# Altium PCB teste2pcb.PcbDoc
Units mm, origin at the board's own origin, x right, y up, seen from the top; angles counter-clockwise.
Board outline 78.1 x 56.64 mm, 2 copper layers (Top Layer, Bottom Layer); 30 components, 19 nets, 104 pads, 0 vias.
Unrouted connection lines stored in the file: 4.
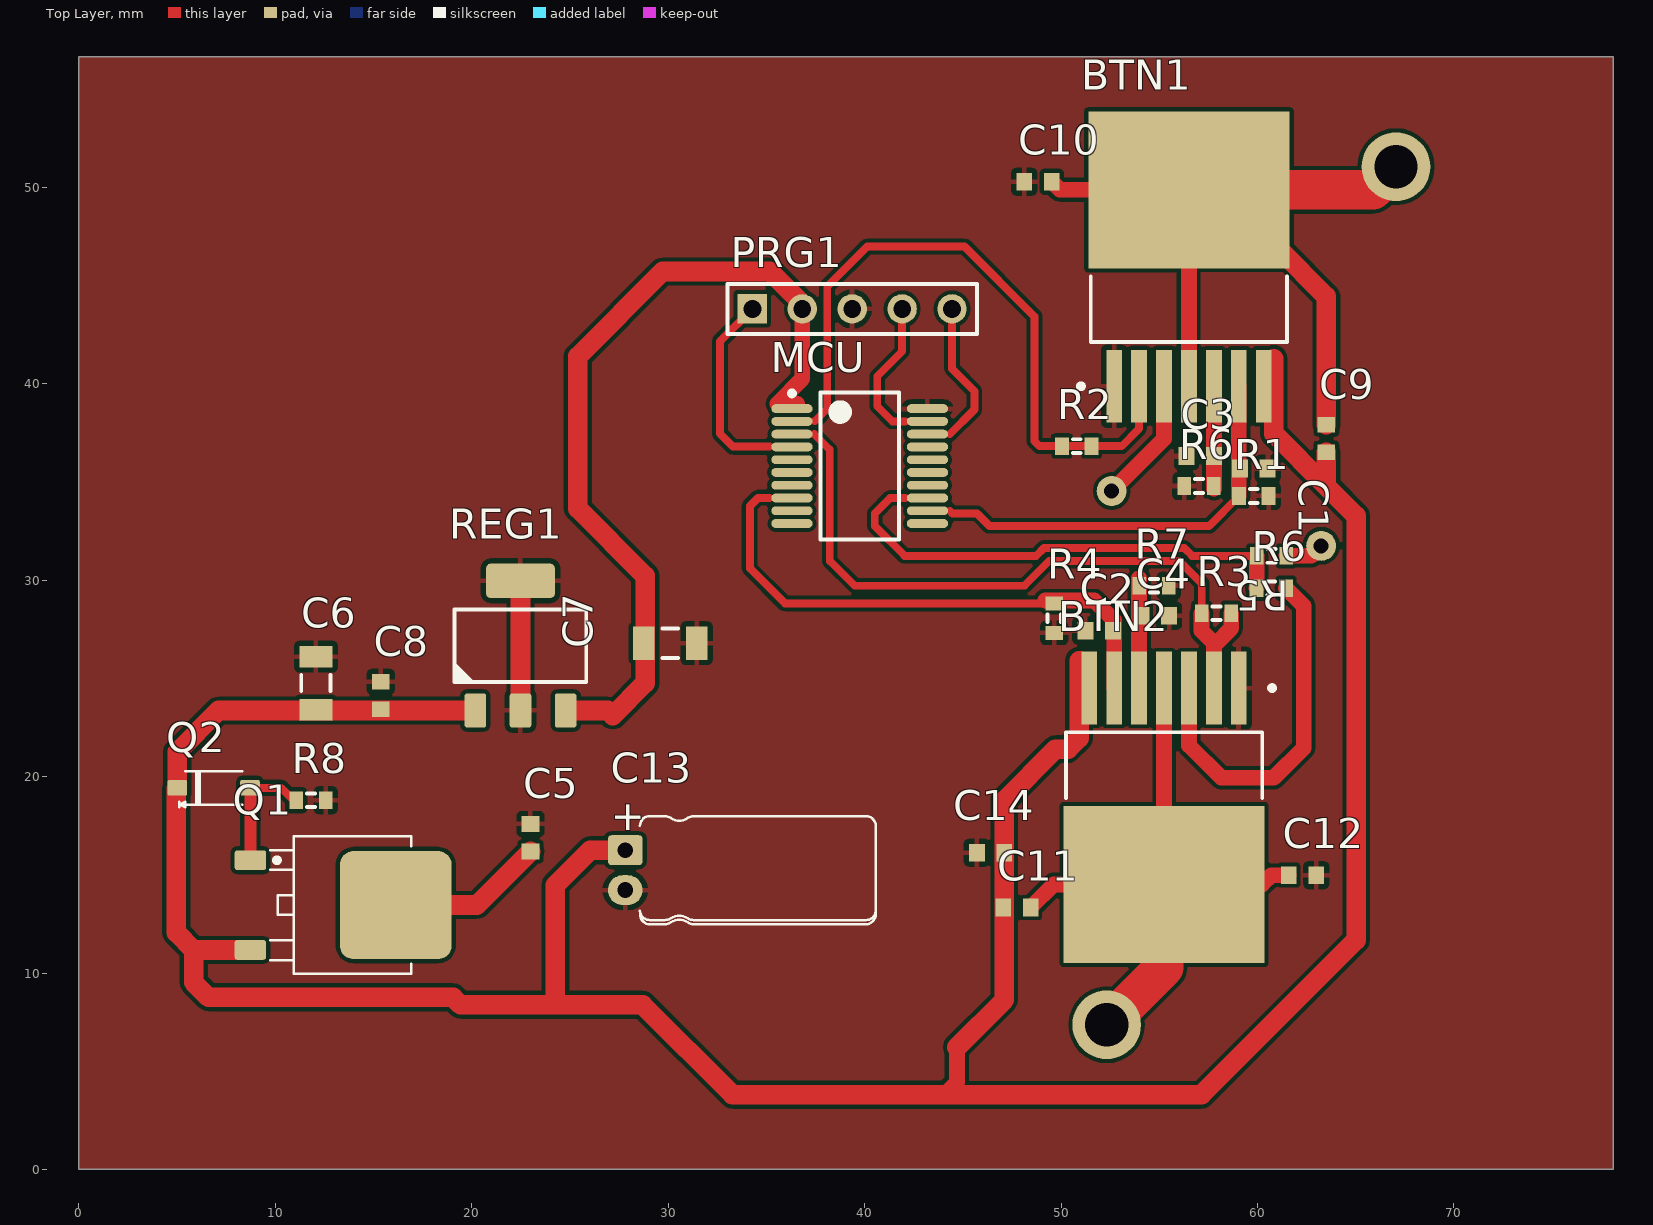
[diagram p0: Top Layer view]
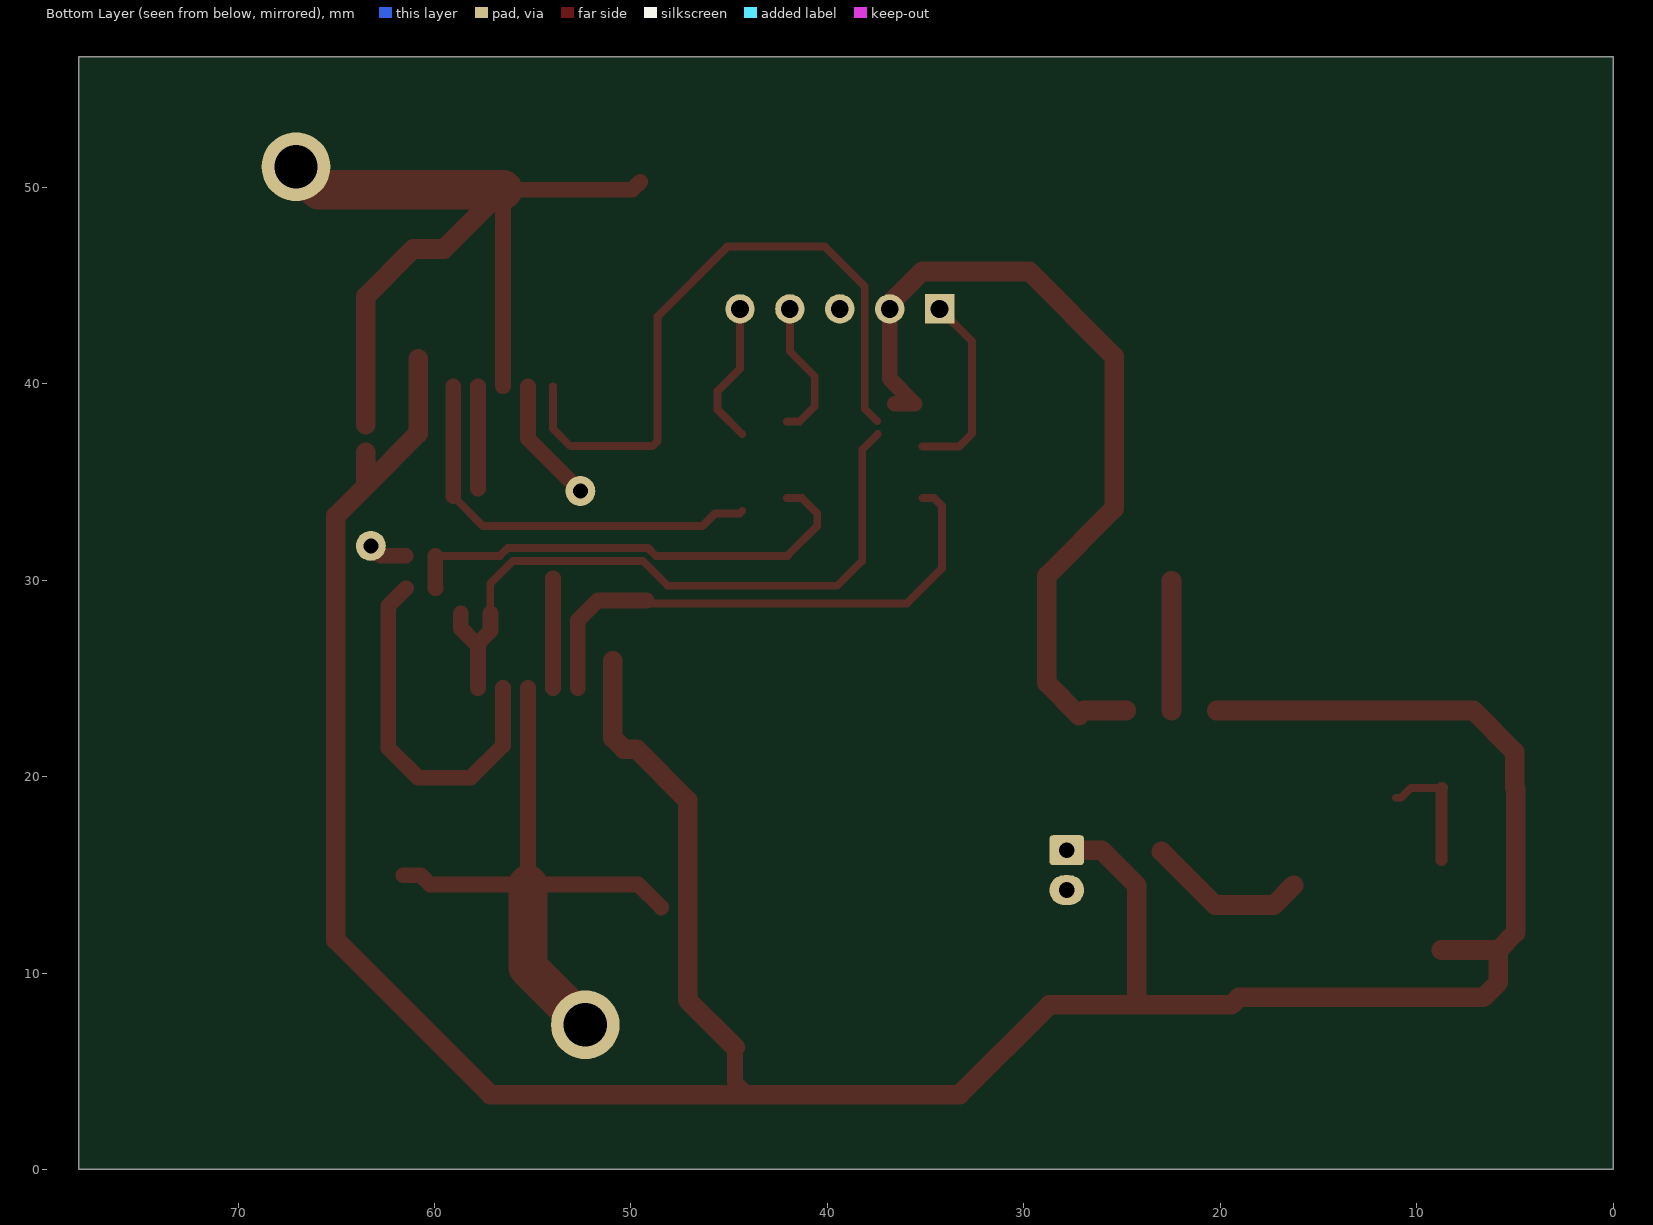
[diagram p1: Bottom Layer view, seen from below]

## Layer stack, top to bottom
Top Solder: solder mask 0.0102, Solder Resist, Dk 3.5
Top Layer: signal copper 0.0356
Dielectric 1: dielectric 0.32, FR-4, Dk 4.8
Bottom Layer: signal copper 0.0356
Bottom Solder: solder mask 0.0102, Solder Resist, Dk 3.5

## Board outline
0,0 78.105,0 78.105,56.642 0,56.642

## Design rules (kind name [scope] priority, off if disabled: settings)
Clearance [All] p1: gap=0.2 ignorepadtopadclearanceinfootprint=FALSE
PolygonConnect [All] p1: connectstyle=Relief reliefconductorwidth=0.254 reliefentries=4 polygonreliefangle="90 Angle" airgapwidth=0.254
RoutingVias [All] p1: holewidth=0.711 width=1.27 viastyle="Through Hole" minholewidth=0.711 minwidth=1.27 maxholewidth=0.711 maxwidth=1.27
SolderMaskExpansion [All] p1: expansion=0.102
Width [All] p1: maxlimit=2 minlimit=0.4 preferedwidth=0.8
30 further rules are at their usual default settings.

## Classes and differential pairs
component class teste2sch: BTN1 BTN2 C1 C2 C3 C4 C5 C6 C7 C8 C9 C10 C11 C12 C13 C14 Q1 Q2 R1 R2 R3 R4 R5 R6 R7 R8 REG1

## Components (designator, comment, footprint, x,y, rotation, side; value= is the part's Value field where it differs from the comment)
BTN1 "BTN8982TA" TO127P1500X440-8N-1 56.515,44.878 r90 top
BTN2 "BTN8982TA" TO127P1500X440-8N-1 55.245,19.511 r270 top
C1 "" 1608[0603] 59.817,35.687 r180 top value=1nF
C2 "" 1608[0603] 51.943,27.432 r0 top value=1nF
C3 "" 1608[0603] 57.088,36.322 r0 top value=100nF
C4 "" 1608[0603] 54.799,28.194 r180 top value=100nF
C5 "" 1608[0603] 22.987,16.891 r270 top value=100nF
C6 "Cap Semi" C1206 12.065,24.765 r270 top value=220nF
C7 "" C1206 30.099,26.797 r0 top value=100nF
C8 "" 1608[0603] 15.367,24.13 r270 top value=100nF
C9 "" 1608[0603] 63.5,37.211 r270 top value=220nF
C10 "" 1608[0603] 48.83,50.292 r0 top value=220nF
C11 "" 1608[0603] 47.752,13.335 r180 top value=220nF
C12 "" 1608[0603] 62.292,14.986 r180 top value=220nF
C13 "1000uF" CAPAE200P550X1200_FLAT1 27.813,15.24 r270 top
C14 "Cap Semi" 1608[0603] 46.417,16.129 r0 top value=100nF
MCU "PIC16F1829T-I/SS" MCHP-SSOP-SS20_N 39.751,35.814 r0 top
PRG1 "Header 5" HDR1X5 34.29,43.815 r0 top
Q1 "IPD50P04P4" TO-252 12.429,13.462 r270 top
Q2 "BZT52HC10WF-7" SOD123 6.858,19.431 r0 top
R1 "" J1-0603 59.817,34.29 r180 top value=1K
R2 "" J1-0603 50.8,36.83 r0 top value=10K
R3 "" J1-0603 57.912,28.321 r180 top value=10K
R4 "" J1-0603 49.657,28.067 r90 top value=1K
R5 "" J1-0603 60.718,31.242 r180 top value=10K
R6 "" J1-0603 57.023,34.798 r0 top value=510
R6 "" J1-0603 60.706,29.591 r180 top value=10K
R7 "" J1-0603 54.737,29.718 r180 top value=510
R8 "" J1-0603 11.811,18.796 r180 top value=10K
REG1 "LM7805MP/NOPB" SOT223 22.479,26.67 r90 top

## Footprints (in the part's own frame and the unit in brackets; to place one, negate y for a bottom-side part, rotate by r counter-clockwise, add the part's x,y. Pads: shape width x height; smd on the part's side, far side on the other; paste and mask are expansions set on the pad)
1608[0603] [mm] "Chip Capacitor, Body 1.6x0.8mm, IPC High Density"
  rect 0.8x0.9 smd: 1(-0.7,0) 2(0.7,0)
  body extent -0.87,-0.48 0.87,0.48, height 1.3
C1206 [mm] "Chip Capacitor, Body 3.2x1.6mm, IPC High Density"
  rect 1.1x1.7 smd: 1(-1.35,0) 2(1.35,0)
  silkscreen extent -0.4,-0.75 0.4,0.75, body extent -1.7,-0.9 1.7,0.9, height 1.3
CAPAE200P550X1200_FLAT1 [mil]
  round 20 on Mech15: 0(0,0)
  rrect25% 60x70 hole 31.5: 1(-40,0)
  oval 60x70 hole 31.5: 2(40,0)
  silkscreen extent -108,30 108,502, body extent -108,-10 108,502, height 217
HDR1X5 [mm] "Connector; Header; 5 Position"
  rect 1.5x1.5 hole 0.9: 1(0,0)
  round 1.5 hole 0.9: 2(2.54,0) 3(5.08,0) 4(7.62,0) 5(10.16,0)
  silkscreen extent -1.27,-1.27 11.43,1.27
J1-0603 [mm] "Chip Resistor, Body 1.6x0.8mm, IPC High Density"
  rect 0.7x0.9 smd: 1(-0.75,0) 2(0.75,0)
  silkscreen extent -0.2,-0.35 0.2,0.35, body extent -0.85,-0.48 0.85,0.48, height 0.9
MCHP-SSOP-SS20_N [mm] "SOP, 20-Leads, Body 7.2x5.3mm, Pitch 0.65mm, IPC Medium Density"
  oval 2.1x0.45 smd: 1(-3.45,2.925) 2(-3.45,2.275) 3(-3.45,1.625) 4(-3.45,0.975) 5(-3.45,0.325) 6(-3.45,-0.325) 7(-3.45,-0.975) 8(-3.45,-1.625) 9(-3.45,-2.275) 10(-3.45,-2.925) 11(3.45,-2.925) 12(3.45,-2.275) 13(3.45,-1.625) 14(3.45,-0.975) 15(3.45,-0.325) 16(3.45,0.325) 17(3.45,0.975) 18(3.45,1.625) 19(3.45,2.275) 20(3.45,2.925)
  silkscreen extent -3.57,-3.75 2,3.82, body extent -2.8,-3.75 2.8,3.75, height 2
SOD123 [mm] "SOD-123; 2 Leads; Body 2.7 x 1.6 mm, (LxW)"
  round 0.508 on Mech15: 0(0,0)
  rrect25% 1x0.8 smd: A(1.85,0) K(-1.85,0)
  silkscreen extent -1.75,-1 1.45,0.85, body extent -1.95,-0.9 1.95,0.9, height 1.18
SOT223 [mm] "SOT223 /SC-73"
  round 1 on Mech15: 0(0,0)
  rrect25% 1.75x1.1 smd: 1(-3.3,2.3) 2(-3.3,0) 3(-3.3,-2.3)
  rrect25% 1.75x3.5 smd: 4(3.3,0)
  silkscreen extent -1.85,-3.35 1.85,3.35, body extent -3.65,-3.35 3.65,3.35, height 1.8
TO127P1500X440-8N-1 [mm] "TO,1.27mm pitch;7 pin,15.00mm L X 9.25mm W X 4.40mm H body"
  rect 3.7x0.8 smd paste+0 mask+0: 1(-5,3.81) 2(-5,2.54) 3(-5,1.27) 4(-5,0) 5(-5,-1.27) 6(-5,-2.54) 7(-5,-3.81)
  rect 8x10.25 smd paste+0 mask+0: 8(5,0)
  silkscreen extent -5.12,-5 0.6,5.62, body extent -6.4,-5 8.55,5, height 4.51
TO-252 [mm] "D-PAK/TO-252-AA; 3 Leads (1 Cropped); Body 10.3 (inc. leads) x 6.7 mm (LxW max)"
  round 0.5 on Mech15: 0(0,0)
  rrect25% 1x1.6 smd: 1(-2.285,-3.7) 3(2.285,-3.7)
  rrect25% 5.5x5.7 smd: 4(0,3.7)
  silkscreen extent -3.5,-2.7 3.5,4.5, body extent -3.3,-3.95 3.3,5.76, height 2.31

## Part data
BTN1 BTN2: "High Current PN Half Bridge NovalithIC", Manufacturer="Infineon Technologies", ManufacturerPartNumber=BTN8982TA, PackageReference=PG-TO263-7-1
C1 C2 C3 C4 C5 C7 C8 C9 C10 C11 C12: library part "Cap Semi", "Capacitor (Semiconductor SIM Model)", LatestRevisionDate=29-May-2009, LatestRevisionNote="IPC-7351 Footprint Added.", PackageDescription="Chip Capacitor", PackageReference=C1206, Published=8-Jun-2000, Publisher="Altium Limited"
C6 C14: "Capacitor (Semiconductor SIM Model)", LatestRevisionDate=29-May-2009, LatestRevisionNote="IPC-7351 Footprint Added.", PackageDescription="Chip Capacitor", PackageReference=C1206, Published=8-Jun-2000, Publisher="Altium Limited"
C13: library part CP
MCU: "Flash Microcontroller with XLP Technology, 32 MHz, 17 I/O, -40 to 85 degC, 20-pin SSOP (SS20), Tape and Reel", Manufacturer=Microchip, Operation Voltage Range="1.8V - 5.5V", Supplier Part Number 1=PIC16F1829T-I/SS-ND, # of A/D Channels=12, ComponentLink1Description=Datasheet, ComponentLink1URL=http://ww1.microchip.com/downloads/en/DeviceDoc/41440C.pdf, ComponentLink2Description="Package Specification", ComponentLink2URL=http://www.microchip.com/stellent/groups/techpub_sg/documents/packagingspec/en012702.pdf, ComponentLink3Description="URL Link1", ComponentLink3URL="Product URL:http://www.microchip.com/datasheet/PIC16F1829", DatasheetVersion="Rev. C", Digital Communication="1 -A/E/USART, 2 -MSSP(SPI/I2C)", EEPROM Data Memory (bytes)=256, I/O Pins=17, Internal Oscillator="32 MHz, 31 kHz", Max. CPU Speed MHz=32, Memory Type=Flash, Mounting Technology="Surface Mount", PackageDescription="20-Lead Plastic Shrink Small Outline, 5.3 x 7.2 mm Body, 0.65 mm Pitch", PackageReference=SSOP-SS20, PackageVersion="C04-072B, 12/2012", Packing=T/R, PartNumber=PIC16F1829T-I/SS, Program Memory KBytes=14, Program Memory KWords=8, RAM=1024, RoHS=TRUE, Supplier 1=Digi-Key, Supplier 2=Newark, Supplier 3=Mouser, Supplier Part Number 2=82R4387, Supplier Part Number 3=579-PIC16F1829T-I/SS, Timers="4 - 8-bit, 1 - 16-bit"
PRG1: "Header, 5-Pin", LatestRevisionDate=17-Jul-2002, LatestRevisionNote="Re-released for DXP Platform.", Publisher="Altium Limited"
Q1: "MOSFET P-Ch -40V -50A DPAK-2 OptiMOS-P2"
Q2: "Diode Zener 10.6V 375 mW AEC-Q101"
R1 R2 R3 R4 R5 R6 R6 R7 R8: library part Res3, "Resistor", LatestRevisionDate=29-May-2009, LatestRevisionNote="IPC-7351 Footprint Added.", PackageDescription="Chip Resistor", PackageReference=J1-0603, Published=8-Jun-2000, Publisher="Altium Limited"
REG1: "5V Regulator, 3-Pin SOT-223, Extended Temperature, Tape and Reel", Supplier Part Number 1=MCP1824ST-1202E/DBTR-ND, ComponentLink1Description=Datasheet, ComponentLink1URL=http://ww1.microchip.com/downloads/en/DeviceDoc/22070a.pdf, ComponentLink2Description="Packaging Specification", ComponentLink2URL=http://www.microchip.com/stellent/groups/techpub_sg/documents/packagingspec/en012702.pdf, ComponentLink3Description="Microchip.com Home", ComponentLink3URL=http://www.microchip.com/, DatasheetVersion="revA, Aug-2007", PackageDescription="3-Lead Plastic Small Outline Transistor (DB) [SOT-223]", PackageReference=SOT-223-DB3, PackageVersion="revBB, Aug-2009", Published=29-Jan-2009, Publisher="Altium Limited", Supplier 1=Digi-Key, Supplier 2=Digi-Key, Supplier 3=Digi-Key, Supplier 4=Farnell, Supplier Part Number 2=MCP1824ST-1202E/DBCT-ND, Supplier Part Number 3=MCP1824ST-1202E/DBDKR-ND, Supplier Part Number 4=1675417

## Free pads (board coordinates)
  round 1.524 hole 0.762: 2(52.578,34.544) 3(63.246,31.75)
  round 3.5 hole 2.2: 4(52.324,7.366) 4(67.056,51.054)

## Nets (pads, with @x,y where several pads share a name; then routed paths per layer and width w, separated by ;. In a path a pad name is that pad's centre, name@x,y a point inside that pad or via, vN(x,y) a via of type N, cw(c..) or ccw(c..) an arc to the next point about the centre after c; other vN are vias at no path point)
5V: C7.1 MCU.1 PRG1.2 REG1.3 | length 43.4
  Top Layer w0.8: 36.576,38.989 35.56,38.989 36.83,40.259 PRG1.2
  Top Layer w1: REG1.3 26.922,23.37 27.178,23.114 28.829,24.765 28.829,30.226 25.4,33.655 25.4,41.402 29.718,45.72 35.179,45.72 36.83,44.069 PRG1.2
GND: BTN1.1 BTN2.1 C1.1 C2.1 C3.1 C4.1 C5.1 C6.1 C7.2 C8.1 C10.1 C12.1 C13.2 C14.1 MCU.20 PRG1.3 R1.1 R4.1 R6.1@56.273,34.798 R7.1 R8.1 REG1.2 REG1.4 | length 6.6
  Top Layer w1: REG1.2 REG1.4
IN1: BTN1.2 MCU.2 R2.1 R2.2 | length 34.3
  Top Layer w0.4: 37.465,38.1 38.1,38.735 38.1,44.958 40.132,46.99 45.085,46.99 48.641,43.434 48.641,37.091 48.902,36.83 R2.1@50.026,36.83 ; R2.1 R2.2 53.086,36.83 53.975,37.719 BTN1.2
IN2: BTN2.2 MCU.3 R3.1 R3.2 | length 34.8
  Top Layer w0.4: 37.436,37.439 38.227,36.648 38.227,30.988 39.497,29.718 48.133,29.718 49.403,30.988 56.007,30.988 57.162,29.833 R3.2
  Top Layer w0.8: R3.2 57.15,28.309 57.15,27.432 57.785,26.797 ; BTN2.2 57.785,26.797 ; R3.1 58.662,27.571 58.674,27.559 57.912,26.797 57.785,26.797
INH: MCU.13 R5.2 R6.2@59.956,29.591 | length 24.6
  Top Layer w0.4: 42.066,34.189 41.301,34.189 40.513,33.401 40.513,32.766 42.037,31.242 48.732,31.242 49.132,31.642 56.278,31.642 56.678,31.242 R5.2
  Top Layer w0.8: R6.2@59.956,29.591 59.968,29.603 R5.2
IS1: BTN1.6 C1.2 MCU.12 R1.2 | length 21.3
  Top Layer w0.4: 44.336,33.539 44.474,33.401 45.72,33.401 46.355,32.766 57.543,32.766 59.055,34.278 R1.2
  Top Layer w0.8: R1.2@59.055,34.278 59.055,35.687 BTN1.6
IS2: BTN2.6 C2.2 MCU.8 R4.2 | length 27.9
  Top Layer w0.4: 35.166,34.189 34.57,34.189 34.163,33.782 34.163,30.607 35.953,28.817 R4.2
  Top Layer w0.8: 49.199,28.968 51.689,28.968 52.705,27.952 BTN2.6
MCLR: MCU.4 PRG1.1 | length 9.8
  Top Layer w0.4: PRG1.1 32.639,42.164 32.639,37.465 33.301,36.803 35.152,36.803
NetBTN1_3: BTN1.3 pad.2 pad.3 R5.1 | length 8.4
  Top Layer w0.8: pad.2 55.245,37.211 BTN1.3 ; R5.1 62.738,31.242 pad.3
NetBTN1_5: BTN1.5 C3.2 R6.2@57.773,34.798 | length 5.2
  Top Layer w0.8: R6.2@57.785,34.671 57.785,36.322 BTN1.5
NetBTN2_3: BTN2.3 R6.1@61.456,29.591 | length 18.6
  Top Layer w0.8: BTN2.3 56.515,21.59 58.166,19.939 60.833,19.939 62.357,21.463 62.357,28.69 R6.1@61.456,29.591
NetQ1_G: Q1.1 Q2.A R8.2 | length 6.3
  Top Layer w0.4: Q2.A 10.287,19.431 10.795,18.923 R8.2@11.061,18.923
  Top Layer w0.6: Q2.A 8.729,19.41 Q1.1
OUT1: BTN1.4 BTN1.8 C9.1 C10.2 pad.4@67.056,51.054 | length 44
  Top Layer w0.8: C10.2 49.944,49.878 BTN1.8 BTN1.4
  Top Layer w1: BTN1.8 59.53,46.863 61.087,46.863 63.5,44.45 C9.1
  Top Layer w2: BTN1.8 65.88,49.878 pad.4@67.056,51.054
OUT2: BTN2.4 BTN2.8 C11.1 C12.2 pad.4@52.324,7.366 | length 32.2
  Top Layer w0.8: C11.1 49.628,14.511 BTN2.8 ; BTN2.4 BTN2.8 ; C12.2 60.706,14.986 60.231,14.511 BTN2.8
  Top Layer w2: pad.4@52.324,7.366 55.245,10.287 BTN2.8
PGC: MCU.18 PRG1.5 | length 7.4
  Top Layer w0.4: 44.336,37.439 45.593,38.696 45.593,39.624 44.45,40.767 PRG1.5
PGD: MCU.19 PRG1.4 | length 7.2
  Top Layer w0.4: PRG1.4 41.91,41.656 40.64,40.386 40.64,38.862 41.413,38.089 42.066,38.089
SR: BTN2.5 C4.2 R7.2 | length 5.6
  Top Layer w0.8: BTN2.5 R7.2@53.975,30.102
VCC: BTN1.7 BTN2.7 C6.2 C8.2 C9.2 C11.2 C13.1 C14.2 Q1.3 Q2.K REG1.1 | length 164.6
  Top Layer w0.8: 44.069,3.81 44.704,4.445 44.704,6.223
  Top Layer w1: Q1.3 5.841,11.177 ; REG1.1 7.114,23.37 5.008,21.264 Q2.K 4.953,19.376 4.953,12.065 5.841,11.177 ; C13.1 26.035,16.256 24.257,14.478 24.257,8.382 ; 44.704,6.223 47.117,8.636 C14.2 47.117,18.796 49.722,21.401 50.357,21.401 50.927,21.971 50.927,25.908 ; 60.833,41.275 60.833,37.465 63.5,34.798 ; C9.2 63.5,34.798 ; 5.841,11.177 5.841,9.526 6.604,8.763 19.05,8.763 19.431,8.382 24.257,8.382 ; 24.257,8.382 28.702,8.382 33.274,3.81 44.069,3.81 57.15,3.81 65.024,11.684 65.024,33.274 63.5,34.798
VIN: C5.2 Q1.4 | length 8.3
  Top Layer w1: Q1.4@16.256,14.478 17.272,13.462 20.258,13.462 C5.2
pads on no net: C13.0 MCU.5 MCU.6 MCU.7 MCU.9 MCU.10 MCU.11 MCU.14 MCU.15 MCU.16 MCU.17 Q1.0 Q2.0 REG1.0

## Polygon pours and split planes (outlines as drawn)
GND on Top Layer "Top Layer-No Net" (solid, pour order 2): 0,0 78.105,0 78.105,56.642 0,56.642

## Silkscreen, mask and mechanical layers (free items; w line width, h text height)
Mechanical 1:
  the board outline again, w1.2

## Text inside footprints (layer, text, board x,y; h text height)
C13: Top Overlay "+" at 27.305,18.796 h1.52 r270